# Altium PCB Flower.PcbDoc
Units mm, origin at the board's own origin, x right, y up, seen from the top; angles counter-clockwise.
Board outline 54.4 x 50 mm, 2 copper layers (Top Layer, Bottom Layer); 33 components, 21 nets, 174 pads, 55 vias.
Unrouted connection lines stored in the file: 1.
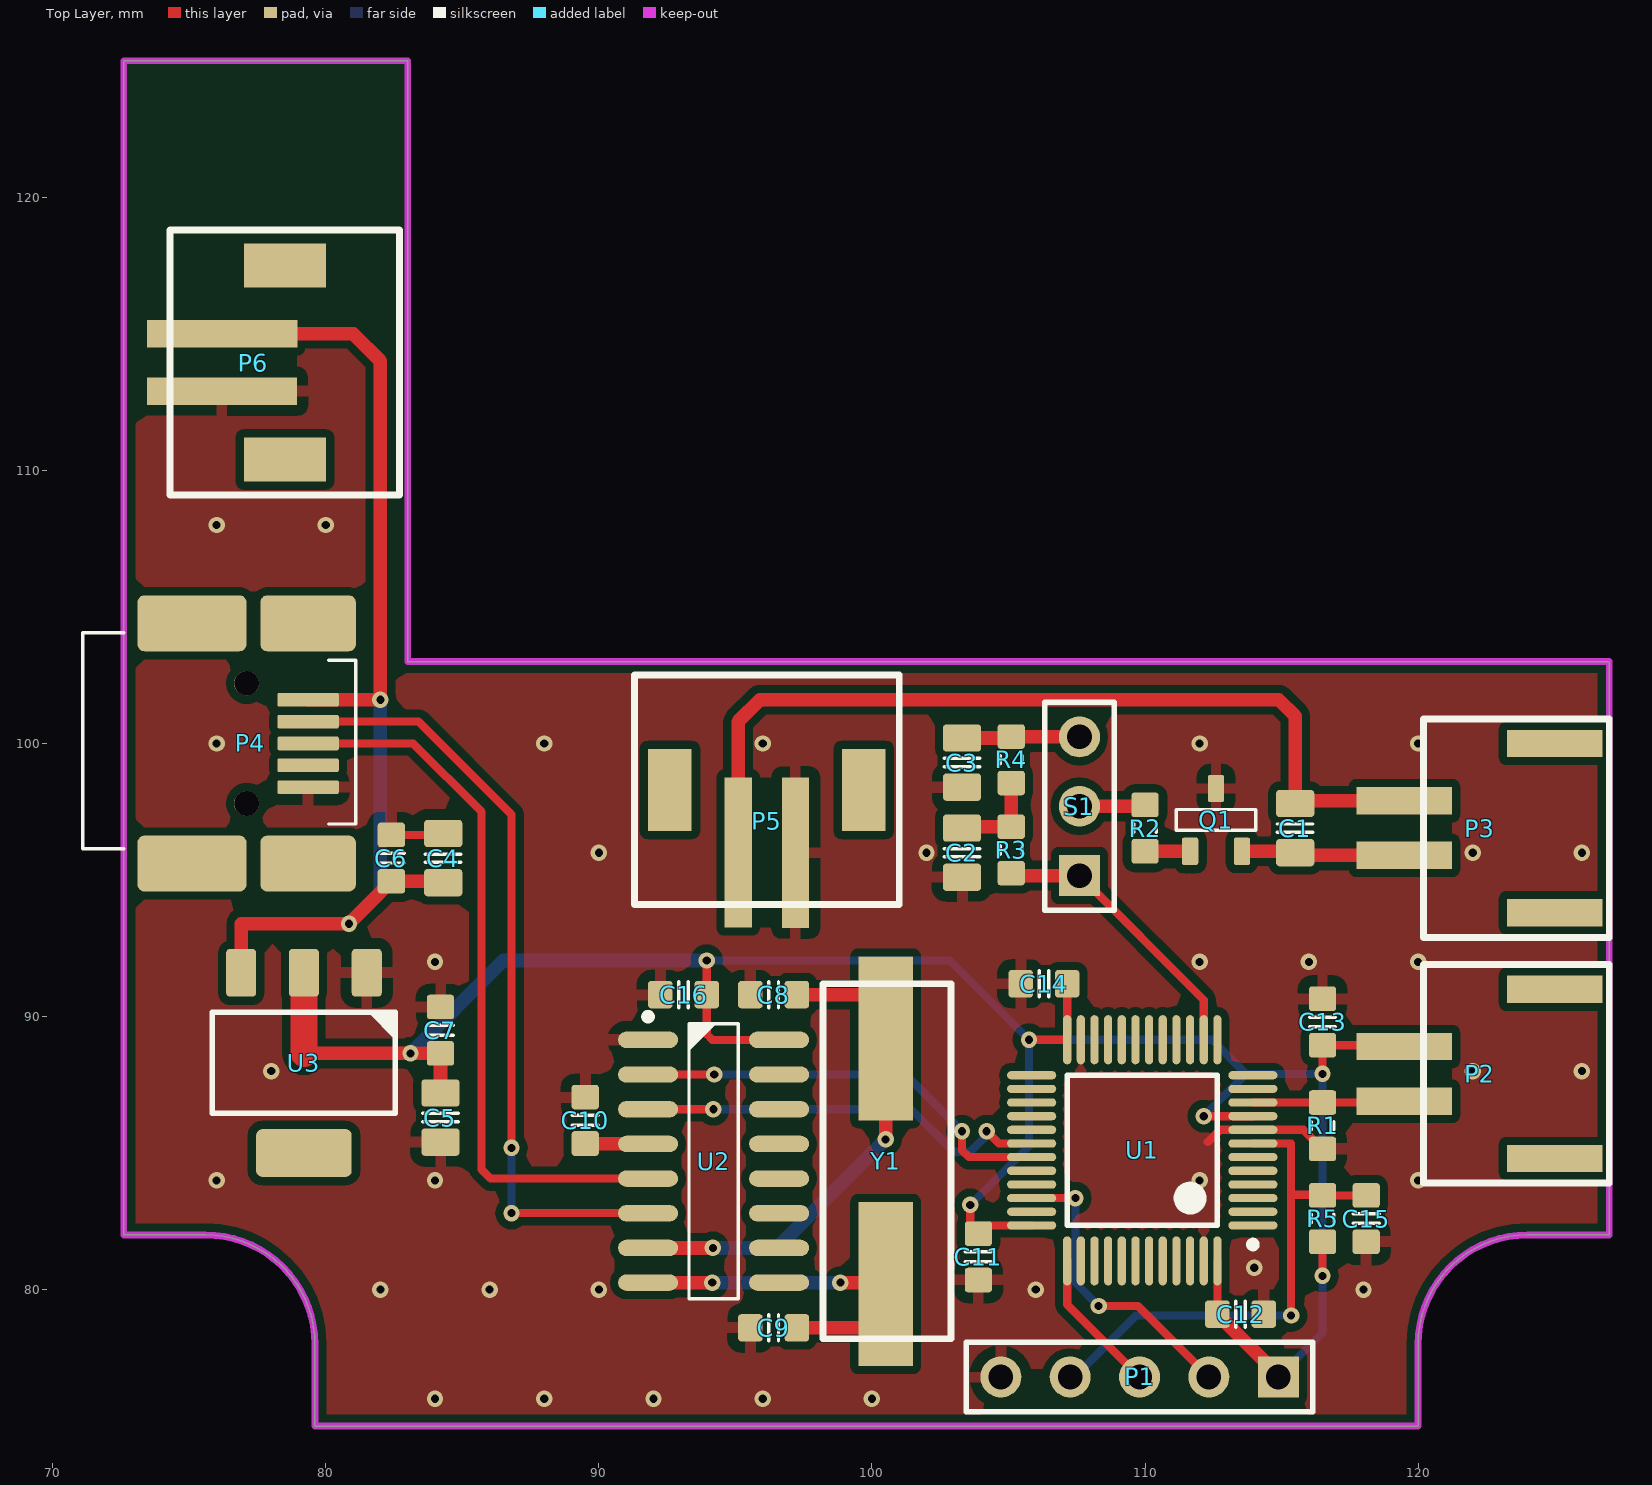
[diagram p0: Top Layer view]
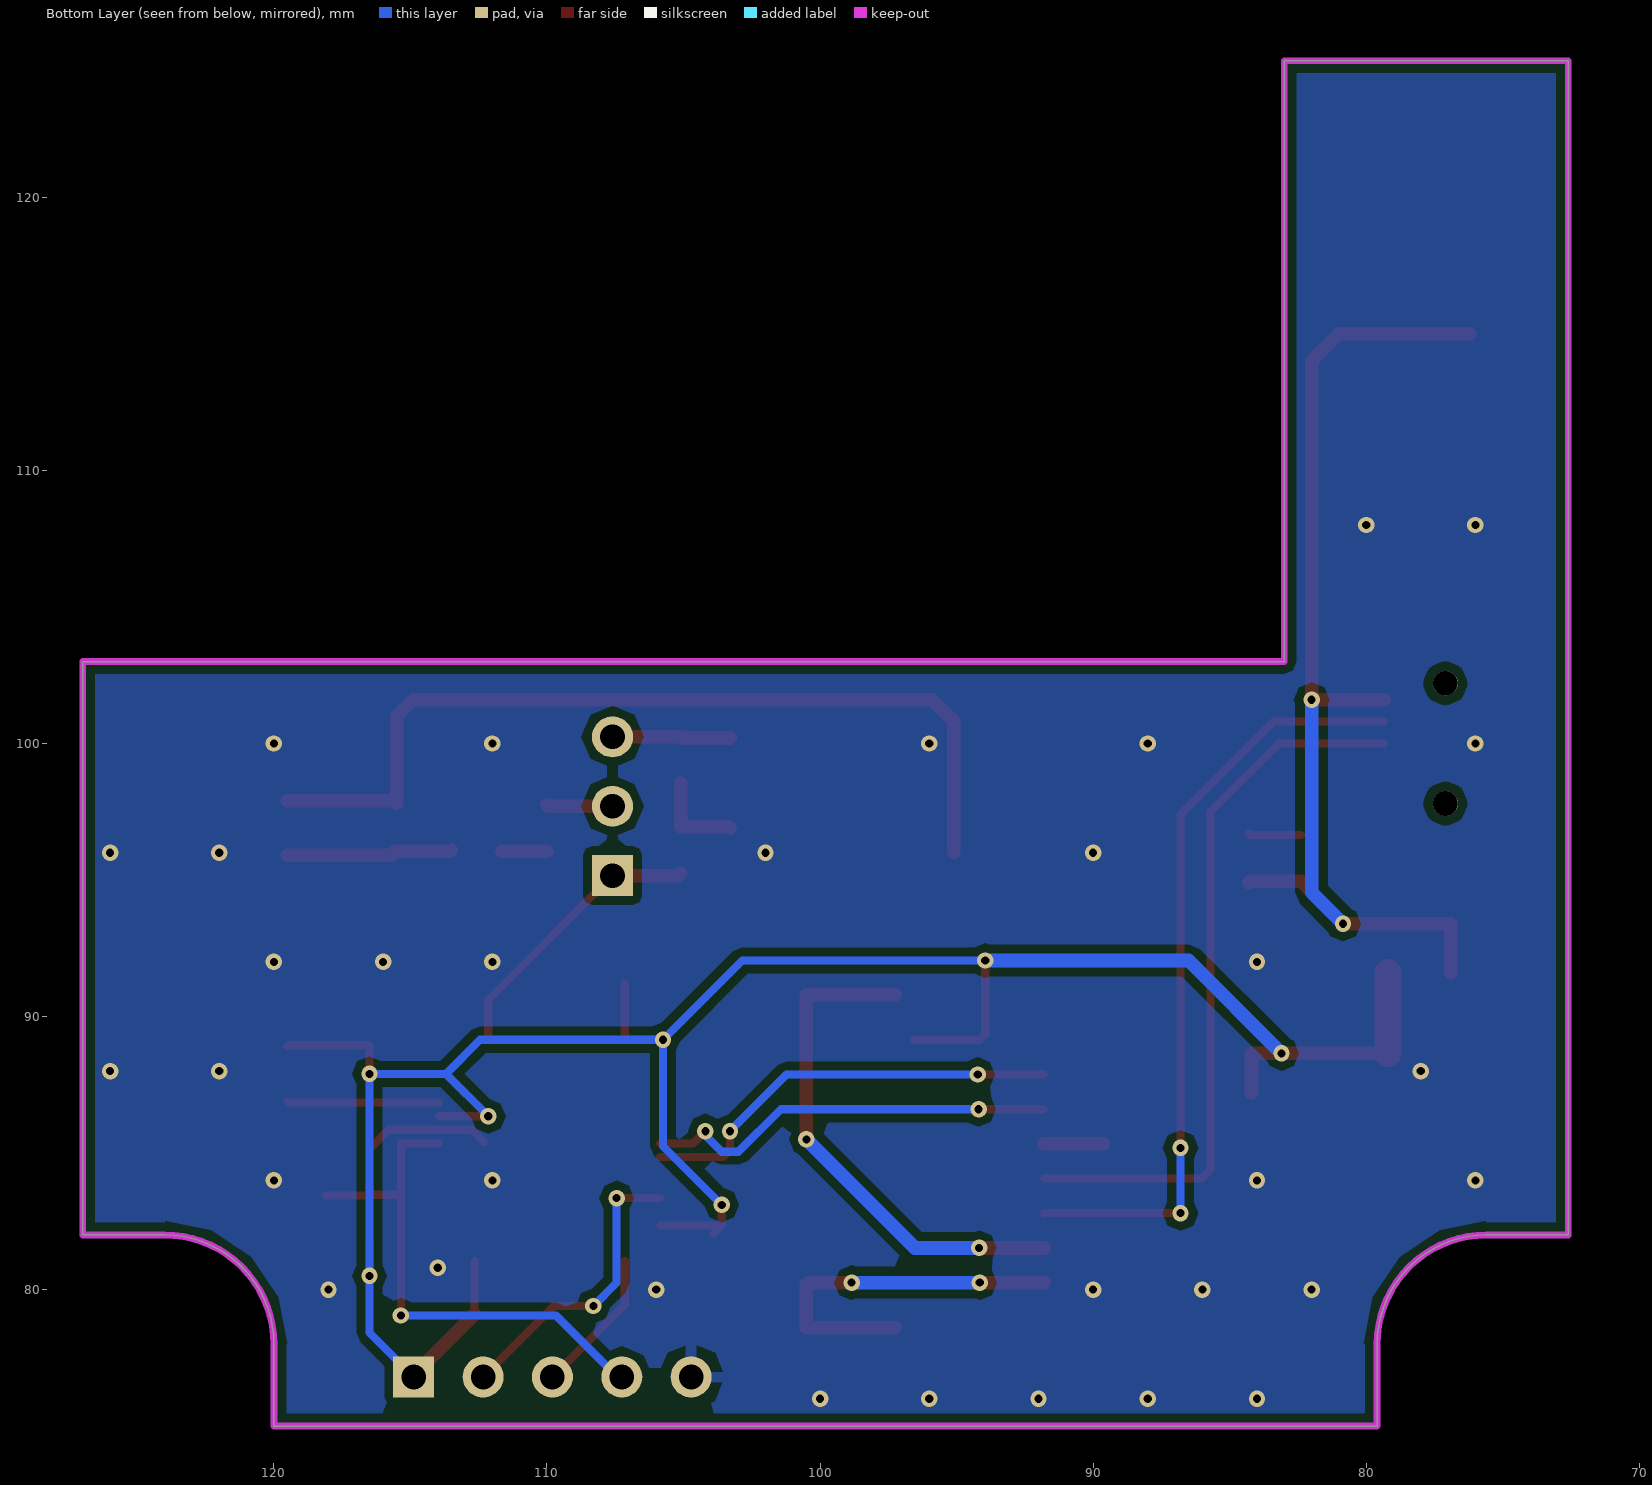
[diagram p1: Bottom Layer view, seen from below]
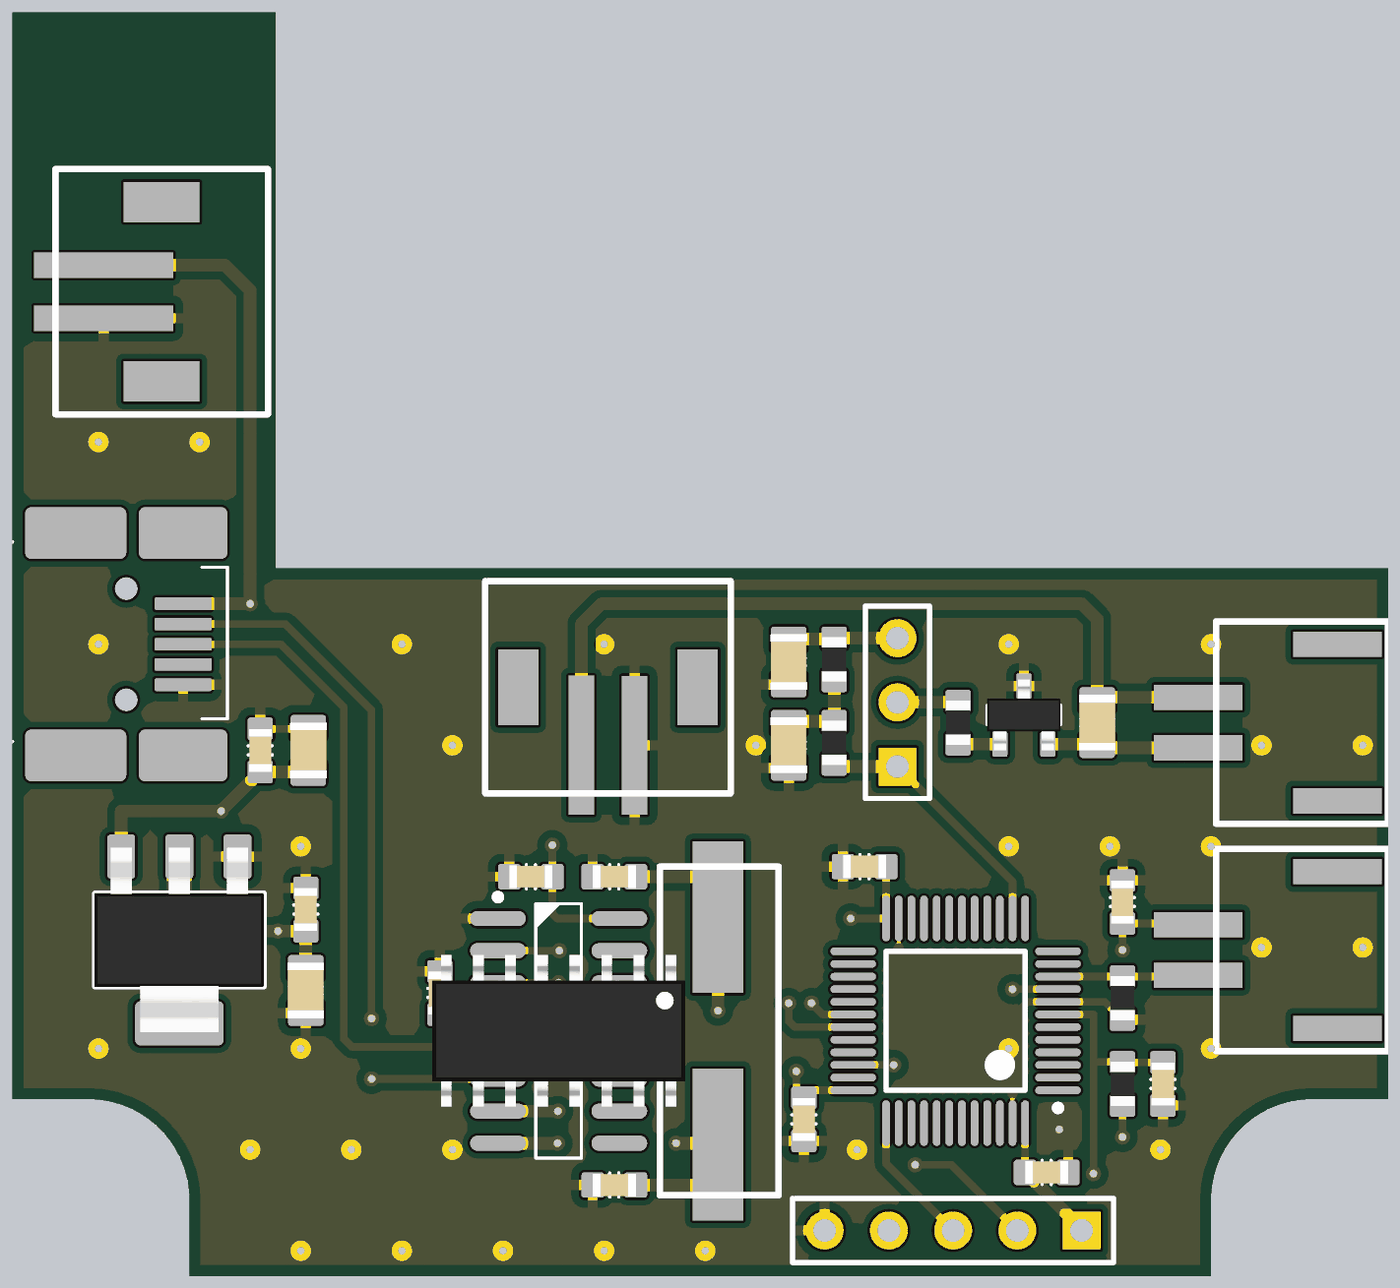
[diagram p2: 3D render of the assembled board from above, using the file's embedded part models]

## Layer stack, top to bottom
Top Solder: solder mask 0.0102, Solder Resist, Dk 3.5
Top Layer: signal copper 0.0356
Dielectric 1: dielectric 0.32, FR-4, Dk 4.8
Bottom Layer: signal copper 0.0356
Bottom Solder: solder mask 0.0102, Solder Resist, Dk 3.5

## Board outline
79.6,78 ccw(c75.6,78) 75.6,82 72.6,82 72.6,125 83,125 83,103 127,103 127,82 124,82 ccw(c124,78) 120,78 120,75 79.6,75

## Design rules (kind name [scope] priority, off if disabled: settings)
Clearance [All] p1: gap=0.3 ignorepadtopadclearanceinfootprint=FALSE
ParallelSegment [All] p1: limit=254 gap=0.254
PolygonConnect PolygonConnect_1 [IsVia] p1: connectstyle=Direct reliefconductorwidth=0.254 reliefentries=4 polygonreliefangle="90 Angle" airgapwidth=0.254
PolygonConnect [All] p2: connectstyle=Relief reliefconductorwidth=0.4 reliefentries=4 polygonreliefangle="90 Angle" airgapwidth=0.4
RoutingVias [All] p1: holewidth=0.3 width=0.6 viastyle="Through Hole" minholewidth=0.3 minwidth=0.6 maxholewidth=0.3 maxwidth=0.6
SolderMaskExpansion [All] p1: expansion=0.102
UnpouredPolygon UnpouredPolygon_1 [All] p1 off:
UnpouredPolygon [InNet('GND')] p2:
Width [All] p1: maxlimit=1 minlimit=0.2 preferedwidth=0.3
29 further rules are at their usual default settings.

## Components (designator, comment, footprint, x,y, rotation, side; value= is the part's Value field where it differs from the comment)
C1 "10mkF" CAPC2012X135N 115.5,96.9 r90 top
C2 "10mkF" CAPC2012X135N 103.3,96 r90 top
C3 "10mkF" CAPC2012X135N 103.3,99.3 r90 top
C4 "10mkF" CAPC2012X135N 84.3,95.8 r90 top
C5 "10mkF" CAPC2012X135N 84.2,86.3 r270 top
C6 "0.1mkF" CAPC1608X90N 82.4,95.8 r270 top
C7 "0.1mkF" CAPC1608X90N 84.2,89.5 r270 top
C8 "22pF" CAPC1608X90N 96.4,90.8 r0 top
C9 "22pF" CAPC1608X90N 96.4,78.6 r0 top
C10 "0.1mkF" CAPC1608X90N 89.5,86.2 r90 top
C11 "0.1mkF" CAPC1608X90N 103.9,81.2 r90 top
C12 "0.1mkF" CAPC1608X90N 113.5,79.1 r180 top
C13 "0.1mkF" CAPC1608X90N 116.5,89.8 r270 top
C14 "0.1mkF" CAPC1608X90N 106.3,91.2 r0 top
C15 "0.1mkF" CAPC1608X90N 118.1,82.6 r90 top
C16 "10mkF" CAPC1608X90N 93.1,90.8 r0 top
P1 "SWD" HDR1X5 114.88,76.8 r180 top
P2 "Sensor" NXW-02SMDK 127,91.9 r270 top
P3 "Pump Motor" NXW-02SMDK 127,100.9 r270 top
P4 "USB" USB_Mini-B_Molex_SMT 71.1,95.05 r0 top
P5 "12 Suply" NXW-02SMD 92.6,98.3 r0 top
P6 "5V Out" NXW-02SMD 78.5,117.5 r270 top
Q1 "IRLML0030TRPBF" SOT23-3 112.6,97.2 r90 top
R1 "4.7k" RESC1608X55N 116.5,86 r90 top
R2 "1K" RESC1608X55N 110,96.9 r270 top
R3 "1K" RESC1608X55N 105.1,96.1 r90 top
R4 "1K" RESC1608X55N 105.1,99.4 r90 top
R5 "1K" RESC1608X55N 116.5,82.6 r270 top
S1 "SW-SPDT" HDR1X3 107.6,95.16 r90 top
U1 "STM32F101C6T6" LQFP48_N 109.9,85.1 r180 top
U2 "CH340G" SOIC127P600X175-16AN 94.2,84.7 r0 top
U3 "LD1117" SOT223 79.2,88.3 r270 top
Y1 "XTAL" "KX-X 8MHz" 100.5,89.2 r270 top value=12MHz

## Footprints (in the part's own frame and the unit in brackets; to place one, negate y for a bottom-side part, rotate by r counter-clockwise, add the part's x,y. Pads: shape width x height; smd on the part's side, far side on the other; paste and mask are expansions set on the pad)
CAPC1608X90N [mm] "Chip Capacitor, Body 1.6x0.8mm, EIA 0603, IPC Medium Density"
  round 0.254 on Mech15: 0(0,0)
  rrect25% 0.9x1 smd: 1(-0.85,0) 2(0.85,0)
  Top Layer pour cut-out: -0.6,0.5 -0.4,0.7 0.4,0.7 0.6,0.5 0.6,-0.5 0.4,-0.7 -0.4,-0.7 -0.6,-0.5
  silkscreen extent -0.18,-0.48 0.18,0.48, body extent -0.85,-0.45 0.85,0.45, height 0.89
CAPC2012X135N [mm] "Chip Capacitor, Body 2.0x1.2mm, EIA 0805, IPC Medium Density"
  round 0.254 on Mech15: 0(0,0)
  rrect25% 1x1.4 smd: 1(-0.9,0) 2(0.9,0)
  Top Layer pour cut-out: -0.675,0.7 -0.475,0.9 0.475,0.9 0.675,0.7 0.675,-0.7 0.475,-0.9 -0.475,-0.9 -0.675,-0.7
  silkscreen extent -0.15,-0.65 0.15,0.65, body extent -1.1,-0.72 1.1,0.73, height 1.34
HDR1X3 [mm] "Connector; Header; 3 Position"
  rect 1.5x1.5 hole 0.9: 1(0,0)
  round 1.5 hole 0.9: 2(2.54,0) 3(5.08,0)
  silkscreen extent -1.27,-1.27 6.35,1.27
HDR1X5 [mm] "Connector; Header; 5 Position"
  rect 1.5x1.5 hole 0.9: 1(0,0)
  round 1.5 hole 0.9: 2(2.54,0) 3(5.08,0) 4(7.62,0) 5(10.16,0)
  silkscreen extent -1.27,-1.27 11.43,1.27
"KX-X 8MHz" [mm] "SMD CRYSTAL"
  rect 6x2 smd: 1(0,0) 2(9,0)
  silkscreen extent -2,-2.3 11,2.4
LQFP48_N [mm] "Thin QFP, 48-Leads, Body 7x7mm, Pitch 0.5mm, IPC Medium Density"
  oval 1.8x0.3 smd: 1(-4.05,2.75) 2(-4.05,2.25) 3(-4.05,1.75) 4(-4.05,1.25) 5(-4.05,0.75) 6(-4.05,0.25) 7(-4.05,-0.25) 8(-4.05,-0.75) 9(-4.05,-1.25) 10(-4.05,-1.75) 11(-4.05,-2.25) 12(-4.05,-2.75) 25(4.05,-2.75) 26(4.05,-2.25) 27(4.05,-1.75) 28(4.05,-1.25) 29(4.05,-0.75) 30(4.05,-0.25) 31(4.05,0.25) 32(4.05,0.75) 33(4.05,1.25) 34(4.05,1.75) 35(4.05,2.25) 36(4.05,2.75)
  oval 0.3x1.8 smd: 13(-2.75,-4.05) 14(-2.25,-4.05) 15(-1.75,-4.05) 16(-1.25,-4.05) 17(-0.75,-4.05) 18(-0.25,-4.05) 19(0.25,-4.05) 20(0.75,-4.05) 21(1.25,-4.05) 22(1.75,-4.05) 23(2.25,-4.05) 24(2.75,-4.05) 37(2.75,4.05) 38(2.25,4.05) 39(1.75,4.05) 40(1.25,4.05) 41(0.75,4.05) 42(0.25,4.05) 43(-0.25,4.05) 44(-0.75,4.05) 45(-1.25,4.05) 46(-1.75,4.05) 47(-2.25,4.05) 48(-2.75,4.05)
  silkscreen extent -4.18,-2.75 2.75,3.57, body extent -3.5,-3.5 3.5,3.5, height 1.6
NXW-02SMD [mm]
  rect 1x5.5 smd: 1(2.5,-2.294) 2(4.6,-2.3)
  rect 1.6x3 smd: ""(0,0) ""(7.1,0)
  silkscreen extent -1.3,-4.2 8.4,4.2
NXW-02SMDK [mm]
  rect 1x3.5 smd: 1(3,-7.5) 2(5,-7.5) ""(0.9,-2) ""(7.1,-2)
  silkscreen extent 0,-6.8 8,0
RESC1608X55N [mm] "Chip Resistor, Body 1.6x0.8mm, EIA 0603, IPC Medium Density"
  round 0.254 on Mech15: 0(0,0)
  rrect25% 0.9x1 smd: 1(-0.85,0) 2(0.85,0)
  Top Layer pour cut-out: -0.6,0.5 -0.4,0.7 0.4,0.7 0.6,0.5 0.6,-0.5 0.4,-0.7 -0.4,-0.7 -0.6,-0.5
  silkscreen extent -0.15,-0.41 0.15,0.41, body extent -0.87,-0.47 0.88,0.48, height 0.54
SOIC127P600X175-16AN [mm] "SOIC, 1.27mm pitch, 16 pin, Body 9.9x3.90mm"
  round 1 on Mech15: 0(0,0)
  oval 2.2x0.6 smd: 1(-2.4,4.445) 2(-2.4,3.175) 3(-2.4,1.905) 4(-2.4,0.635) 5(-2.4,-0.635) 6(-2.4,-1.905) 7(-2.4,-3.175) 8(-2.4,-4.445) 9(2.4,-4.445) 10(2.4,-3.175) 11(2.4,-1.905) 12(2.4,-0.635) 13(2.4,0.635) 14(2.4,1.905) 15(2.4,3.175) 16(2.4,4.445)
  silkscreen extent -2.52,-5.03 0.9,5.42, body extent -3,-5 3,5, height 1.75
SOT23-3 [mm] "SOT23, 3 pin"
  round 0.5 on Mech15: 0(0,0)
  rrect25% 1x0.6 smd: 1(-1.15,0.95) 2(-1.15,-0.95) 3(1.15,0)
  silkscreen extent -0.38,-1.45 0.38,1.45, body extent -1.4,-1.45 1.4,1.45, height 1.29
SOT223 [mm] "SOT223 /SC-73"
  round 1 on Mech15: 0(0,0)
  rrect25% 1.75x1.1 smd: 1(-3.3,2.3) 2(-3.3,0) 3(-3.3,-2.3)
  rrect25% 1.75x3.5 smd: 4(3.3,0)
  silkscreen extent -1.85,-3.35 1.85,3.35, body extent -3.65,-3.35 3.65,3.35, height 1.8
USB_Mini-B_Molex_SMT [mm]
  rrect25% 2.25x0.5 smd: 1(8.25,6.55) 2(8.25,5.75) 3(8.25,4.95) 4(8.25,4.15) 5(8.25,3.35)
  round 0.9 hole 0.9 unplated: H1(6,7.15) H2(6,2.75)
  rrect25% 4x2.05 smd: MH1(4,0.55) MH4(4,9.35)
  rrect25% 3.5x2.05 smd: MH2(8.25,0.55) MH3(8.25,9.35)
  silkscreen extent 0,1.1 10,9, body extent 0,1.1 9,9, height 3.95

## Part data
C1 C2 C3 C6 C7 C8 C9 C10 C11 C12 C13 C14 C15 C16: library part "Cap Semi", "Capacitor (Semiconductor SIM Model)", LatestRevisionDate=29-May-2009, LatestRevisionNote="IPC-7351 Footprint Added.", PackageDescription="Chip Capacitor", PackageReference=C1206, Published=8-Jun-2000, Publisher="Altium Limited"
C4 C5: library part "Cap Pol2", "Polarized Capacitor (Axial)", LatestRevisionDate=17-Jul-2002, LatestRevisionNote="Re-released for DXP Platform.", PackageDescription="Polarized Capacitor; 2 Leads", PackageReference=POLAR0.8, Published=8-Jun-2000, Publisher="Altium Limited"
P1 P4: library part "Header 5", "Header, 5-Pin", LatestRevisionDate=17-Jul-2002, LatestRevisionNote="Re-released for DXP Platform.", Publisher="Altium Limited"
P2 P3 P5 P6: library part "Header 2", "Header, 2-Pin", LatestRevisionDate=17-Jul-2002, LatestRevisionNote="Re-released for DXP Platform.", Publisher="Altium Limited"
Q1: library part NMOS-2, "N-Channel Power MOSFET", ComponentLink1Description="Manufacturer Link", ComponentLink1URL=http://www.irf.com/, DatasheetVersion=PD-9.814, LatestRevisionDate=17-Jul-2002, LatestRevisionNote="Re-released for DXP Platform.", Note="Pin 2 is electrically connected to pin 4.", PackageDescription="TO, Thru-Hole, Vertical, Heatsink Mounted; 3 In-Line Leads; Pitch 2.54 mm", PackageReference=TO-220AB, PackageVersion=Feb-1997, Published=8-Jun-2000, Publisher="Altium Limited"
R1 R2 R3 R4 R5: library part Res2, "Resistor", LatestRevisionDate=17-Jul-2002, LatestRevisionNote="Re-released for DXP Platform.", PackageDescription="Axial Device, Thru-Hole; 2 Leads; 0.4 in Pin Spacing", PackageReference=AXIAL-0.4, Published=8-Jun-2000, Publisher="Altium Limited"
S1: "SPDT Subminiature Toggle Switch, Right Angle Mounting, Vertical Actuation", ComponentLink1Description="Manufacturer Link", ComponentLink1URL=http://www.apem.com, DatasheetVersion=05-Dec-2000, LatestRevisionDate=17-Dec-2003, LatestRevisionNote="Schematic revised, PCB Footprint replaced.", PackageDescription="Switch; 4 Leads", PackageReference=TL36WW15050, Published=24-Mar-1999, Publisher="Altium Limited"
U1: "STM32 ARM-based 32-bit MCU with 32 Kbytes Flash, 48-pin LQFP, Industrial Temperature", ComponentLink1Description="Manufacturer Link", ComponentLink1URL=www.st.com/stm32, ComponentLink2Description=Datasheet, ComponentLink2URL=http://www.st.com/stonline/products/literature/ds/13586.pdf, DatasheetVersion="rev6, Mar-2008", PackageDescription="48-Pin Low-Profile Quad Flat Pack, 7 x 7 mm Body, 0.5 mm Pitch (LQFP48)", PackageReference=LQFP48, PackageVersion=Mar-2008, Published=30-May-2008, Publisher="Altium Limited"
Y1: "Crystal Oscillator", LatestRevisionDate=17-Jul-2002, LatestRevisionNote="Re-released for DXP Platform.", PackageDescription="Crystal, Thru-Hole; 2 Leads; Body 3.1 x 8.2 mm (Dia.xH)", PackageReference=R38, Published=8-Jun-2000, Publisher="Altium Limited"

## Via types
v1: diameter 0.6, hole 0.3, Top Layer to Bottom Layer, 32 vias
v2: diameter 0.6, hole 0.3, Top Layer to Bottom Layer, tented both sides, 23 vias

## Nets (pads, with @x,y where several pads share a name; then routed paths per layer and width w, separated by ;. In a path a pad name is that pad's centre, name@x,y a point inside that pad or via, vN(x,y) a via of type N, cw(c..) or ccw(c..) an arc to the next point about the centre after c; other vN are vias at no path point)
3V3: C5.1 C7.2 C11.2 C12.2 C13.2 C14.2 C16.2 P1.1 P2.1 R5.2 U1.9 U1.24 U1.48 U2.16 U3.2 | length 91.4
  Top Layer w0.3: v2(93.95,92.05) C16.2 93.95,89.35 94.155,89.145 U2.16 ; v2(103.6,83.1) C11.2@103.6,82.35 ; C11.2 C11.2@103.6,82.35 ; v2(105.75,89.15) U1.24 C14.2 ; 105.85,82.35 103.9,82.35 C11.2@103.6,82.35 ; v2(112.15,86.35) U1.9 ; C12.2 U1.48 ; v2(116.5,80.5) R5.2 ; v2(116.5,87.9) C13.2 119.45,88.95 P2.1
  Top Layer w0.5: 79.2,88.65 v2(83.1,88.65) C7.2 C5.1 ; C12.2 114.88,76.87 P1.1
  Top Layer w1: 79.2,88.65 U3.2
  Bottom Layer w0.3: v2(93.95,92.05) 102.85,92.05 v2(105.75,89.15) ; v2(103.6,83.1) 105.75,85.25 v2(105.75,89.15) ; v2(112.15,86.35) 113.7,87.9 ; P1.1 116.5,78.42 v2(116.5,80.5) v2(116.5,87.9) 113.7,87.9 ; v2(105.75,89.15) 112.45,89.15 113.7,87.9
  Bottom Layer w0.5: v2(83.1,88.65) 86.5,92.05 v2(93.95,92.05)
5V: C4.1 C6.2 P4.1 P6.1 U3.3 | length 39.8
  Top Layer w0.5: P6.1 81,115 82,114 v2(82,101.6) P4.1 ; U3.3 76.9,93.4 v2(80.85,93.4) C6.2 84.25,94.95 C4.1
  Bottom Layer w0.5: v2(80.85,93.4) 82,94.55 v2(82,101.6)
12V: C1.2 P3.1 P5.1 | length 33
  Top Layer w0.5: P5.1 95.1,100.8 95.9,101.6 114.9,101.6 115.5,101 C1.2@115.5,97.9 ; C1.2 C1.2@115.5,97.9 ; P3.1 C1.2@115.5,97.9
ADC: P2.2 R1.2 U1.10 | length 5.6
  Top Layer w0.3: U1.10 R1.2 119.45,86.85 P2.2
D+: P4.3 U2.5 | length 26.7
  Top Layer w0.3: P4.3 83.2,100 85.7,97.5 85.7,84.4 86.035,84.065 U2.5
D-: P4.2 U2.6 | length 28.5
  Top Layer w0.3: P4.2 83.4,100.8 86.8,97.4 v2(86.8,85.19) ; v2(86.8,82.8) 91.795,82.8 U2.6
  Bottom Layer w0.3: v2(86.8,82.8) v2(86.8,85.19)
GND: C2.1 C3.1 C4.2 C5.2 C6.1 C7.1 C8.1 C9.1 C10.2 C11.1 C12.1 C13.1 C14.1 C15.1 C16.1 P1.5 P4.5 P5.2 P6.2 Q1.3 R1.1 U1.8 U1.23 U1.47 U2.1 U3.1 | length 6.6
  Top Layer w0.3: C6.1 84.25,96.65 C4.2 ; 112.3,85.4 112.75,85.85 U1.8 115.8,85.85 R1.1
  other v1: 84,76 88,76 92,76 96,76 100,76 82,80 86,80 90,80 106,80 118,80 76,84 84,84 112,84 120,84 78,88 122,88 126,88 84,92 112,92 116,92 120,92 90,96 102,96 122,96 126,96 76,100 88,100 96,100 112,100 120,100 76,108 80,108
  other v2: 114,80.8
"Motor PWM": R3.1 S1.1 U1.14 | length 10.4
  Top Layer w0.3: S1.1 112.15,90.61 U1.14
  Top Layer w0.5: R3.1 105.19,95.16 S1.1
NetC1_1: C1.1 P3.2 Q1.2 | length 6
  Top Layer w0.5: Q1.2 115.5,96.05 115.55,96.05 115.7,95.9 P3.2
NetC2_2: C2.2 R3.2 R4.1 | length 3.4
  Top Layer w0.5: C2.2 103.35,96.95 R3.2 R4.1
NetC3_2: C3.2 R4.2 S1.3 | length 4.3
  Top Layer w0.5: C3.2 105.05,100.2 R4.2 105.11,100.24 S1.3
NetC8_2: C8.2 U2.7 Y1.1 | length 18.9
  Top Layer w0.5: U2.7 v2(94.175,81.525) ; C8.2 100.5,90.8 Y1.1 v2(100.5,85.5)
  Bottom Layer w0.5: v2(94.175,81.525) 96.525,81.525 v2(100.5,85.5)
NetC9_2: C9.2 U2.8 Y1.2 | length 13.6
  Top Layer w0.5: U2.8 v2(94.155,80.255) ; C9.2 100.5,78.6 Y1.2 100.445,80.255 v2(98.845,80.255)
  Bottom Layer w0.5: v2(94.155,80.255) v2(98.845,80.255)
NetC10_1: C10.1 U2.4 | length 2.2
  Top Layer w0.5: C10.1@89.615,85.335 U2.4
NetQ1_1: Q1.1 R2.2 | length 1.7
  Top Layer w0.5: R2.2 Q1.1
NetR2_1: R2.1 S1.2 | length 2.4
  Top Layer w0.5: S1.2 109.95,97.7 R2.1
RST: C15.2 P1.4 R5.1 U1.7 | length 19.8
  Top Layer w0.3: U1.7 115.35,85.35 115.35,83.475 ; v2(115.35,79.05) 115.35,83.475 ; R5.1 C15.2 ; R5.1@116.5,83.757 116.5,83.475 115.35,83.475
  Bottom Layer w0.3: P1.4 107.419,76.8 109.669,79.05 v2(115.35,79.05)
Rx: U1.31 U2.2 | length 15.7
  Top Layer w0.3: U2.2 v2(94.225,87.875) ; v2(103.3,85.8) 103.3,85.1 103.55,84.85 U1.31
  Bottom Layer w0.3: v2(94.225,87.875) 101.225,87.875 v2(103.3,85.8)
SWCLK: P1.3 U1.37 | length 5.3
  Top Layer w0.3: U1.37 107.15,79.45 P1.3
SWIO: P1.2 U1.34 | length 11
  Top Layer w0.3: U1.34 v2(107.45,83.35) ; v2(108.3,79.4) 109.74,79.4 P1.2
  Bottom Layer w0.3: v2(107.45,83.35) 107.45,80.25 v2(108.3,79.4)
Tx: U1.30 U2.3 | length 15.3
  Top Layer w0.3: U2.3 v2(94.195,86.605) ; v2(104.2,85.8) 104.65,85.35 U1.30
  Bottom Layer w0.3: v2(94.195,86.605) 101.434,86.605 102.989,85.05 103.611,85.05 104.2,85.639 v2(104.2,85.8)
pads on no net: C1.0 C2.0 C3.0 C4.0 C5.0 C6.0 C7.0 C8.0 C9.0 C10.0 C11.0 C12.0 C13.0 C14.0 C15.0 C16.0 P2. P3. P4.4 P4.H1 P4.H2 P4.MH1 P4.MH2 P4.MH3 P4.MH4 P5. P6. Q1.0 R1.0 R2.0 R3.0 R4.0 R5.0 U1.1 U1.2 U1.3 U1.4 U1.5 U1.6 U1.11 U1.12 U1.13 U1.15 U1.16 U1.17 U1.18 U1.19 U1.20 U1.21 U1.22 U1.25 U1.26 U1.27 U1.28 U1.29 U1.32 U1.33 U1.35 U1.36 U1.38 U1.39 U1.40 U1.41 U1.42 U1.43 U1.44 U1.45 U1.46 U2.0 U2.9 U2.10 U2.11 U2.12 U2.13 U2.14 U2.15 U3.0 U3.4

## Polygon pours and split planes (outlines as drawn)
GND on Top Layer "GND_L01_P000" (solid, remove dead copper, pour order 0): 72.6,125 72.6,82.1 79.7,75 120,75 127,82 127,103 83,103 83,125
GND on Bottom Layer "BotGND" (solid, remove dead copper, pour order 2): 72.6,125 83,125 83,103 127,103 127,82 120,75 79.6,75 72.6,82

## Keep-outs
Keep-Out Layer:
  lines w0.254: 72.6,82 72.6,125 83,125 83,121.4 83,103 127,103 127,82 124,82 ccw(c124,78) 120,78 120,75 79.6,75 79.6,78 ccw(c75.6,78) 75.6,82 72.6,82

## Silkscreen, mask and mechanical layers (free items; w line width, h text height)
Mechanical 1:
  lines w0.254: 84,104 84,125 127,125 127,104 84,104